# EAGLE board 00A-010-B (EAGLE 6.3)
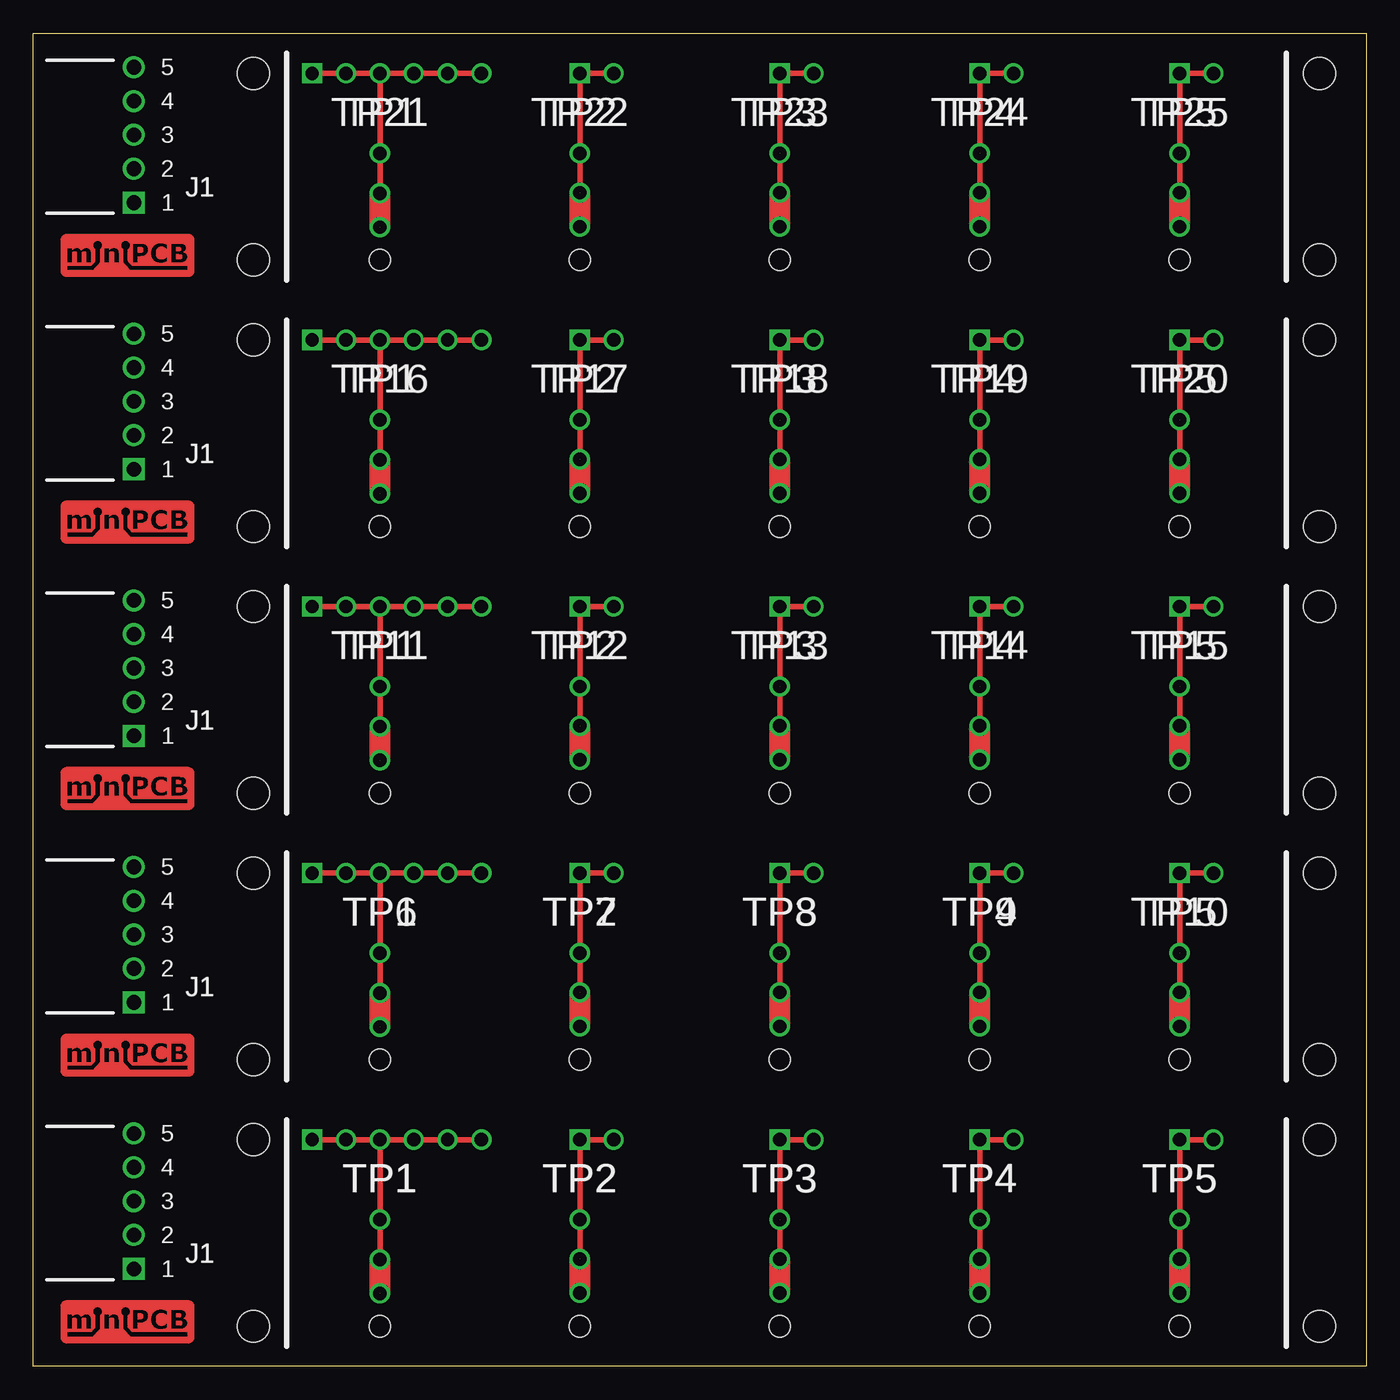
[diagram p0: board, top side]
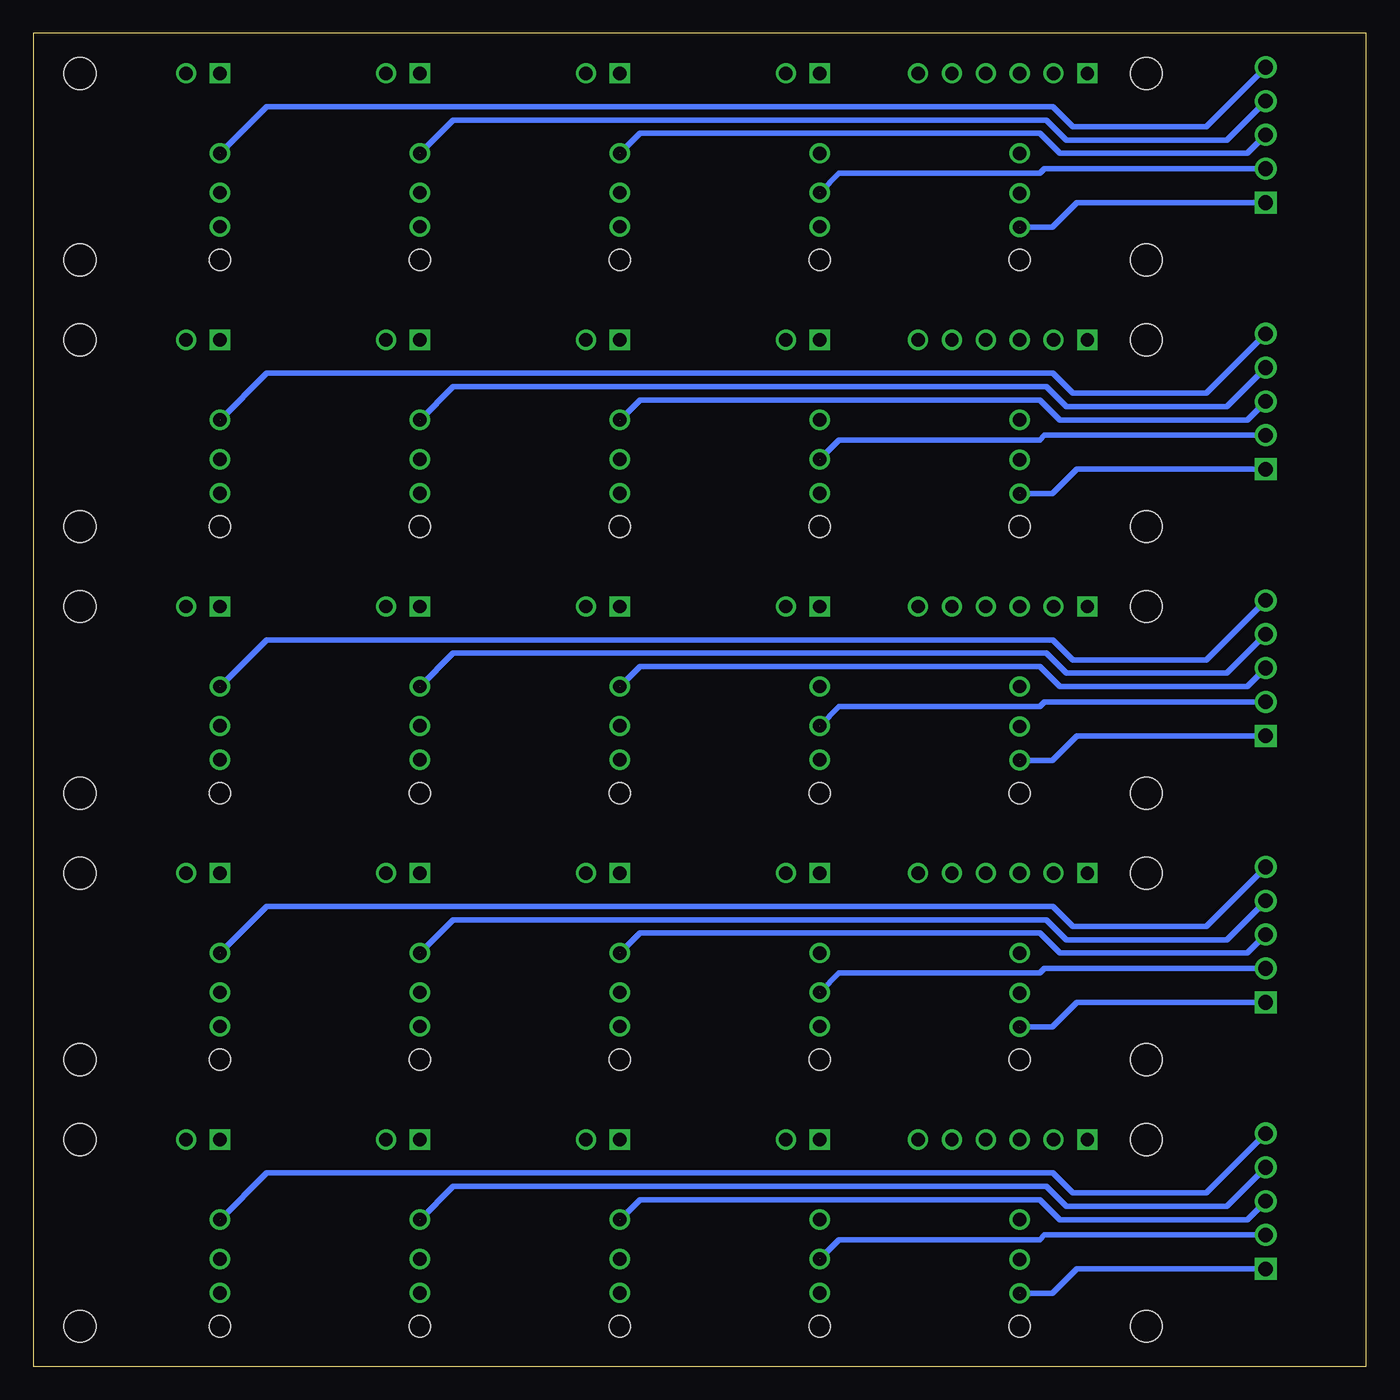
[diagram p1: board, bottom side, seen from below]

Size 100 x 100 mm. Coordinates in mm from the lower left corner, seen from the top.
Outline: 0,0 0,100 100,100 100,0 0,0
Copper layers (1*16): Top 0.035mm / dielectric 1.5mm / Bottom 0.035mm
Design rules "minipcb": minimum track width 10mil, minimum drill 24mil, track to track 8mil, track to pad 8mil, pad to pad 8mil, via to via 8mil, smd to smd 8mil, copper to edge 40mil, drill to drill 8mil, minimum pad ring 10mil, minimum via ring 8mil, stop-mask expansion 4mil, vias tented up to drill 20mil, thermal gap 10mil
Holes 1.6 mm at 26,3 41,3 56,3 71,3 86,3 26,23 41,23 56,23 71,23 86,23 26,43 41,43 56,43 71,43 86,43 26,63 41,63 56,63 71,63 86,63 26,83 41,83 56,83 71,83 86,83

## Footprints (pad centres in the part's own frame; a part is rotated, then mirrored left to right if it is on the bottom)
MINIPCB_IDB20-X-05 = drill 1.1 square: 1 7.54,7.3 | drill 1.1: 2 7.54,9.84; 3 7.54,12.38; 4 7.54,14.92; 5 7.54,17.46 | hole 2.4: 96.5,3; 96.5,17; 16.5,3; 16.5,17
PINS_6_NOTEXT = drill 1 square: 1 0,0 | drill 1: 2 2.54,0; 3 5.08,0; 4 7.62,0; 5 10.16,0; 6 12.7,0
PINS_1_1MM_K = drill 1: 1 0,0; 2 2.54,0
PINS_2_NOTEXT = drill 1 square: 1 0,0 | drill 1: 2 2.54,0
PINS_1_TESTPOINT_KE5000 = drill 1: 1 0,0

## Placement (x,y rotation side)
E$1  [MINIPCB_PANEL_IMAGEFRAME]  -27,-30 0 top  (outside the outline)
J1  [MINIPCB_IDB20-X-05]  0,0 0 top
J2  [PINS_6_NOTEXT]  20.92,17 0 top
J3  [MINIPCB_IDB20-X-05]  0,20 0 top
J4  [PINS_6_NOTEXT]  20.92,37 0 top
J5  [MINIPCB_IDB20-X-05]  0,40 0 top
J6  [PINS_6_NOTEXT]  20.92,57 0 top
J7  [MINIPCB_IDB20-X-05]  0,60 0 top
J8  [PINS_6_NOTEXT]  20.92,77 0 top
J9  [MINIPCB_IDB20-X-05]  0,80 0 top
J10  [PINS_6_NOTEXT]  20.92,97 0 top
P1  [PINS_1_1MM_K]  26,8 270 top
P2  [PINS_2_NOTEXT]  41,17 0 top
P3  [PINS_2_NOTEXT]  56,17 0 top
P4  [PINS_2_NOTEXT]  71,17 0 top
P5  [PINS_2_NOTEXT]  86,17 0 top
P6  [PINS_2_NOTEXT]  41,37 0 top
P7  [PINS_1_1MM_K]  41,5.5 90 top
P8  [PINS_1_1MM_K]  56,5.5 90 top
P9  [PINS_1_1MM_K]  71,5.5 90 top
P10  [PINS_1_1MM_K]  86,5.5 90 top
P11  [PINS_2_NOTEXT]  56,37 0 top
P12  [PINS_2_NOTEXT]  71,37 0 top
P13  [PINS_2_NOTEXT]  86,37 0 top
P14  [PINS_1_1MM_K]  41,25.5 90 top
P15  [PINS_1_1MM_K]  56,25.5 90 top
P16  [PINS_1_1MM_K]  71,25.5 90 top
P17  [PINS_1_1MM_K]  86,25.5 90 top
P18  [PINS_1_1MM_K]  26,28 270 top
P19  [PINS_2_NOTEXT]  41,57 0 top
P20  [PINS_2_NOTEXT]  56,57 0 top
P21  [PINS_2_NOTEXT]  71,57 0 top
P22  [PINS_2_NOTEXT]  86,57 0 top
P23  [PINS_1_1MM_K]  41,45.5 90 top
P24  [PINS_1_1MM_K]  56,45.5 90 top
P25  [PINS_1_1MM_K]  71,45.5 90 top
P26  [PINS_1_1MM_K]  86,45.5 90 top
P27  [PINS_1_1MM_K]  26,48 270 top
P28  [PINS_2_NOTEXT]  41,77 0 top
P29  [PINS_2_NOTEXT]  56,77 0 top
P30  [PINS_2_NOTEXT]  71,77 0 top
P31  [PINS_2_NOTEXT]  86,77 0 top
P32  [PINS_1_1MM_K]  41,65.5 90 top
P33  [PINS_1_1MM_K]  56,65.5 90 top
P34  [PINS_1_1MM_K]  71,65.5 90 top
P35  [PINS_1_1MM_K]  86,65.5 90 top
P36  [PINS_1_1MM_K]  26,68 270 top
P37  [PINS_2_NOTEXT]  41,97 0 top
P38  [PINS_2_NOTEXT]  56,97 0 top
P39  [PINS_2_NOTEXT]  71,97 0 top
P40  [PINS_2_NOTEXT]  86,97 0 top
P41  [PINS_1_1MM_K]  41,85.5 90 top
P42  [PINS_1_1MM_K]  56,85.5 90 top
P43  [PINS_1_1MM_K]  71,85.5 90 top
P44  [PINS_1_1MM_K]  86,85.5 90 top
P45  [PINS_1_1MM_K]  26,88 270 top
TP1  [PINS_1_TESTPOINT_KE5000]  26,11 0 top
TP2  [PINS_1_TESTPOINT_KE5000]  41,11 0 top
TP3  [PINS_1_TESTPOINT_KE5000]  56,11 0 top
TP4  [PINS_1_TESTPOINT_KE5000]  71,11 0 top
TP5  [PINS_1_TESTPOINT_KE5000]  86,11 0 top
TP6  [PINS_1_TESTPOINT_KE5000]  26,31 0 top
TP7  [PINS_1_TESTPOINT_KE5000]  41,31 0 top
TP8  [PINS_1_TESTPOINT_KE5000]  56,31 0 top
TP9  [PINS_1_TESTPOINT_KE5000]  71,31 0 top
TP10  [PINS_1_TESTPOINT_KE5000]  86,31 0 top
TP11  [PINS_1_TESTPOINT_KE5000]  26,51 0 top
TP12  [PINS_1_TESTPOINT_KE5000]  41,51 0 top
TP13  [PINS_1_TESTPOINT_KE5000]  56,51 0 top
TP14  [PINS_1_TESTPOINT_KE5000]  71,51 0 top
TP15  [PINS_1_TESTPOINT_KE5000]  86,51 0 top
TP16  [PINS_1_TESTPOINT_KE5000]  26,71 0 top
TP17  [PINS_1_TESTPOINT_KE5000]  41,71 0 top
TP18  [PINS_1_TESTPOINT_KE5000]  56,71 0 top
TP19  [PINS_1_TESTPOINT_KE5000]  71,71 0 top
TP20  [PINS_1_TESTPOINT_KE5000]  86,71 0 top
TP21  [PINS_1_TESTPOINT_KE5000]  26,91 0 top
TP22  [PINS_1_TESTPOINT_KE5000]  41,91 0 top
TP23  [PINS_1_TESTPOINT_KE5000]  56,91 0 top
TP24  [PINS_1_TESTPOINT_KE5000]  71,91 0 top
TP25  [PINS_1_TESTPOINT_KE5000]  86,91 0 top

## Library data of the parts
E$1 J2 J4 J6 J8 J10 P1-P45 TP1-TP25 = minipcb
J1 J3 J5 J7 J9 = minipcb; PART_NUMBER_REV: 00A-010-B

## Nets
N$2: J1.2 P2.1 P2.2 P7.1 P7.2 TP2.1
N$5: J1.1 J2.1 J2.2 J2.3 J2.4 J2.5 J2.6 P1.1 P1.2 TP1.1
N$7: J1.3 P3.1 P3.2 P8.1 P8.2 TP3.1
N$10: J1.4 P4.1 P4.2 P9.1 P9.2 TP4.1
N$12: J1.5 P5.1 P5.2 P10.1 P10.2 TP5.1
N$15: J3.2 P6.1 P6.2 P14.1 P14.2 TP7.1
N$17: J3.1 J4.1 J4.2 J4.3 J4.4 J4.5 J4.6 P18.1 P18.2 TP6.1
N$20: J3.3 P11.1 P11.2 P15.1 P15.2 TP8.1
N$22: J3.4 P12.1 P12.2 P16.1 P16.2 TP9.1
N$25: J3.5 P13.1 P13.2 P17.1 P17.2 TP10.1
N$26: J5.2 P19.1 P19.2 P23.1 P23.2 TP12.1
N$27: J5.1 J6.1 J6.2 J6.3 J6.4 J6.5 J6.6 P27.1 P27.2 TP11.1
N$28: J5.3 P20.1 P20.2 P24.1 P24.2 TP13.1
N$29: J5.4 P21.1 P21.2 P25.1 P25.2 TP14.1
N$30: J5.5 P22.1 P22.2 P26.1 P26.2 TP15.1
N$31: J7.2 P28.1 P28.2 P32.1 P32.2 TP17.1
N$32: J7.1 J8.1 J8.2 J8.3 J8.4 J8.5 J8.6 P36.1 P36.2 TP16.1
N$33: J7.3 P29.1 P29.2 P33.1 P33.2 TP18.1
N$34: J7.4 P30.1 P30.2 P34.1 P34.2 TP19.1
N$35: J7.5 P31.1 P31.2 P35.1 P35.2 TP20.1
N$36: J9.2 P37.1 P37.2 P41.1 P41.2 TP22.1
N$37: J9.1 J10.1 J10.2 J10.3 J10.4 J10.5 J10.6 P45.1 P45.2 TP21.1
N$38: J9.3 P38.1 P38.2 P42.1 P42.2 TP23.1
N$39: J9.4 P39.1 P39.2 P43.1 P43.2 TP24.1
N$40: J9.5 P40.1 P40.2 P44.1 P44.2 TP25.1

## Tracks (layer width: path | path; a pad name or v marks a point on that pad's centre or on a via)
N$1  (1 unrouted)
N$2
  Top 0.406: P7.1 P7.2 TP2.1 P2.1 P2.2
  Bottom 0.406: J1.2 24.16,9.84 24.5,9.5 39.54,9.5 P7.2
N$3  (1 unrouted)
N$4  (1 unrouted)
N$5
  Top 0.406: P1.2 P1.1 TP1.1 J2.3 | J2.1 J2.2 J2.3 | J2.3 J2.4 J2.5 J2.6
  Bottom 0.406: J1.1 21.7,7.3 23.54,5.46 P1.2
N$6  (1 unrouted)
N$7
  Top 0.406: P8.1 P8.2 TP3.1 P3.1 P3.2
  Bottom 0.406: J1.3 8.92,11 23,11 24.5,12.5 54.5,12.5 TP3.1
N$8  (1 unrouted)
N$9  (1 unrouted)
N$10
  Top 0.406: P4.2 P4.1 TP4.1 P9.2 P9.1
  Bottom 0.406: J1.4 10.46,12 22.5,12 24,13.5 68.5,13.5 TP4.1
N$11  (1 unrouted)
N$12
  Top 0.406: P5.2 P5.1 TP5.1 P10.2 P10.1
  Bottom 0.406: J1.5 12,13 22,13 23.5,14.5 82.5,14.5 TP5.1
N$13  (1 unrouted)
N$14  (1 unrouted)
N$15
  Top 0.406: P14.1 P14.2 TP7.1 P6.1 P6.2
  Bottom 0.406: J3.2 24.16,29.84 24.5,29.5 39.54,29.5 P14.2
N$16  (1 unrouted)
N$17
  Top 0.406: P18.2 P18.1 TP6.1 J4.3 | J4.1 J4.2 J4.3 | J4.3 J4.4 J4.5 J4.6
  Bottom 0.406: J3.1 21.7,27.3 23.54,25.46 P18.2
N$18  (1 unrouted)
N$19  (1 unrouted)
N$20
  Top 0.406: P15.1 P15.2 TP8.1 P11.1 P11.2
  Bottom 0.406: J3.3 8.92,31 23,31 24.5,32.5 54.5,32.5 TP8.1
N$21  (1 unrouted)
N$22
  Top 0.406: P12.2 P12.1 TP9.1 P16.2 P16.1
  Bottom 0.406: J3.4 10.46,32 22.5,32 24,33.5 68.5,33.5 TP9.1
N$23  (1 unrouted)
N$24  (1 unrouted)
N$25
  Top 0.406: P13.2 P13.1 TP10.1 P17.2 P17.1
  Bottom 0.406: J3.5 12,33 22,33 23.5,34.5 82.5,34.5 TP10.1
N$26
  Top 0.406: P23.1 P23.2 TP12.1 P19.1 P19.2
  Bottom 0.406: J5.2 24.16,49.84 24.5,49.5 39.54,49.5 P23.2
N$27
  Top 0.406: P27.2 P27.1 TP11.1 J6.3 | J6.1 J6.2 J6.3 | J6.3 J6.4 J6.5 J6.6
  Bottom 0.406: J5.1 21.7,47.3 23.54,45.46 P27.2
N$28
  Top 0.406: P24.1 P24.2 TP13.1 P20.1 P20.2
  Bottom 0.406: J5.3 8.92,51 23,51 24.5,52.5 54.5,52.5 TP13.1
N$29
  Top 0.406: P21.2 P21.1 TP14.1 P25.2 P25.1
  Bottom 0.406: J5.4 10.46,52 22.5,52 24,53.5 68.5,53.5 TP14.1
N$30
  Top 0.406: P22.2 P22.1 TP15.1 P26.2 P26.1
  Bottom 0.406: J5.5 12,53 22,53 23.5,54.5 82.5,54.5 TP15.1
N$31
  Top 0.406: P32.1 P32.2 TP17.1 P28.1 P28.2
  Bottom 0.406: J7.2 24.16,69.84 24.5,69.5 39.54,69.5 P32.2
N$32
  Top 0.406: P36.2 P36.1 TP16.1 J8.3 | J8.1 J8.2 J8.3 | J8.3 J8.4 J8.5 J8.6
  Bottom 0.406: J7.1 21.7,67.3 23.54,65.46 P36.2
N$33
  Top 0.406: P33.1 P33.2 TP18.1 P29.1 P29.2
  Bottom 0.406: J7.3 8.92,71 23,71 24.5,72.5 54.5,72.5 TP18.1
N$34
  Top 0.406: P30.2 P30.1 TP19.1 P34.2 P34.1
  Bottom 0.406: J7.4 10.46,72 22.5,72 24,73.5 68.5,73.5 TP19.1
N$35
  Top 0.406: P31.2 P31.1 TP20.1 P35.2 P35.1
  Bottom 0.406: J7.5 12,73 22,73 23.5,74.5 82.5,74.5 TP20.1
N$36
  Top 0.406: P41.1 P41.2 TP22.1 P37.1 P37.2
  Bottom 0.406: J9.2 24.16,89.84 24.5,89.5 39.54,89.5 P41.2
N$37
  Top 0.406: P45.2 P45.1 TP21.1 J10.3 | J10.1 J10.2 J10.3 | J10.3 J10.4 J10.5 J10.6
  Bottom 0.406: J9.1 21.7,87.3 23.54,85.46 P45.2
N$38
  Top 0.406: P42.1 P42.2 TP23.1 P38.1 P38.2
  Bottom 0.406: J9.3 8.92,91 23,91 24.5,92.5 54.5,92.5 TP23.1
N$39
  Top 0.406: P39.2 P39.1 TP24.1 P43.2 P43.1
  Bottom 0.406: J9.4 10.46,92 22.5,92 24,93.5 68.5,93.5 TP24.1
N$40
  Top 0.406: P40.2 P40.1 TP25.1 P44.2 P44.1
  Bottom 0.406: J9.5 12,93 22,93 23.5,94.5 82.5,94.5 TP25.1
S$3  (1 unrouted)
S$7  (1 unrouted)
S$10  (1 unrouted)
S$14  (1 unrouted)
S$17  (1 unrouted)
S$21  (1 unrouted)
S$24  (1 unrouted)
S$28  (1 unrouted)
S$31  (1 unrouted)
S$35  (1 unrouted)

## Text on the board
_tPlace: J1 | J1 | J1 | J1 | J1
_tNames: TP1 | TP2 | TP3 | TP4 | TP5 | TP1 | TP2 | TP3 | TP4 | TP5 | TP1 | TP2 | TP3 | TP4 | TP5 | TP1 | TP2 | TP3 | TP4 | TP5 | TP1 | TP2 | TP3 | TP4 | TP5